# Altium PCB FanControllerPCB.PcbDoc
Units mm, origin at the board's own origin, x right, y up, seen from the top; angles counter-clockwise.
Board outline 91.21 x 81.73 mm, 2 copper layers (Top Layer, Bottom Layer); 39 components, 34 nets, 153 pads, 12 vias.
Unrouted connection lines stored in the file: 4.
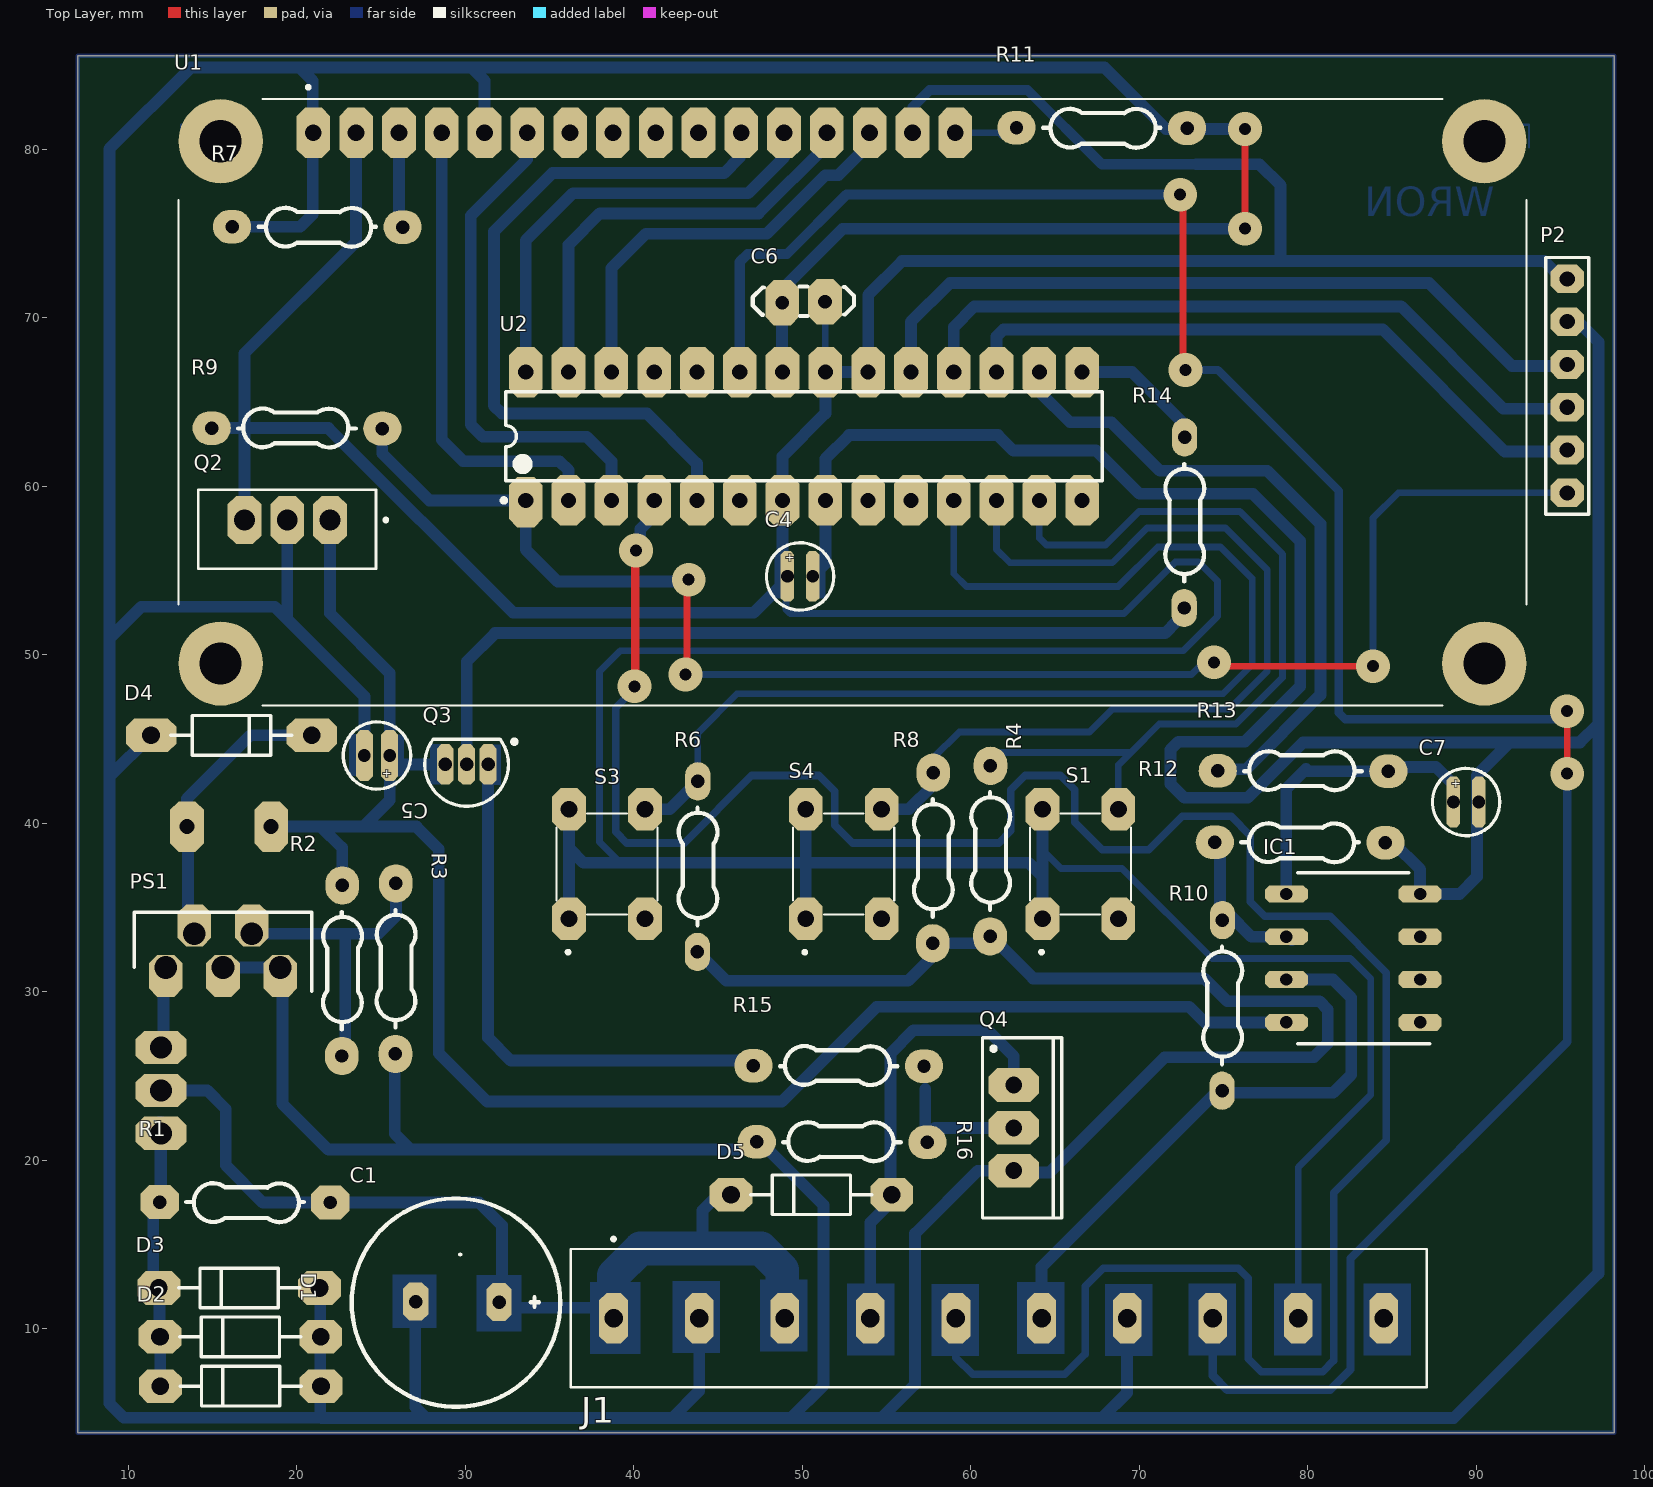
[diagram p0: Top Layer view]
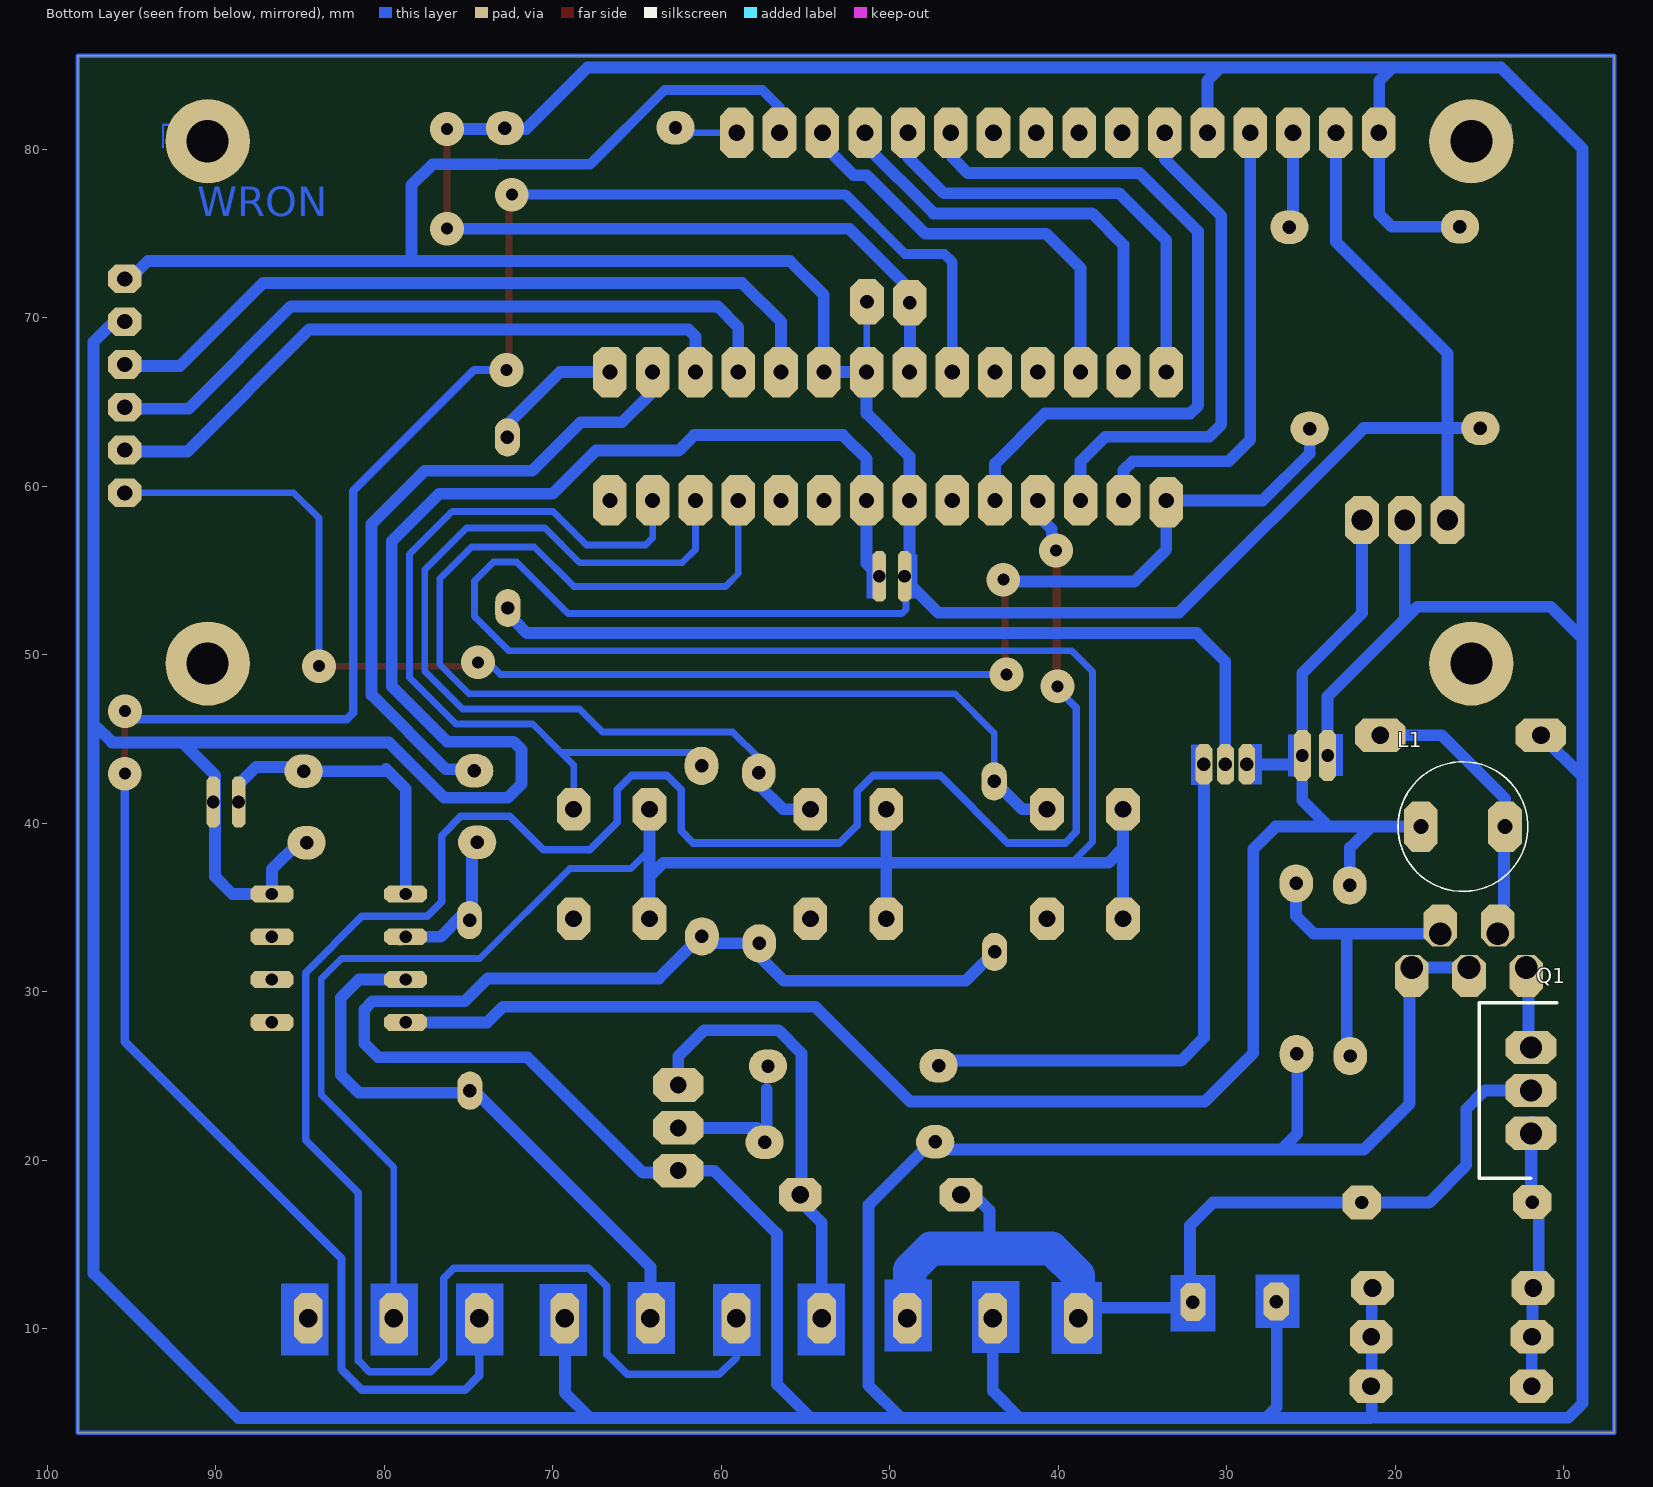
[diagram p1: Bottom Layer view, seen from below]
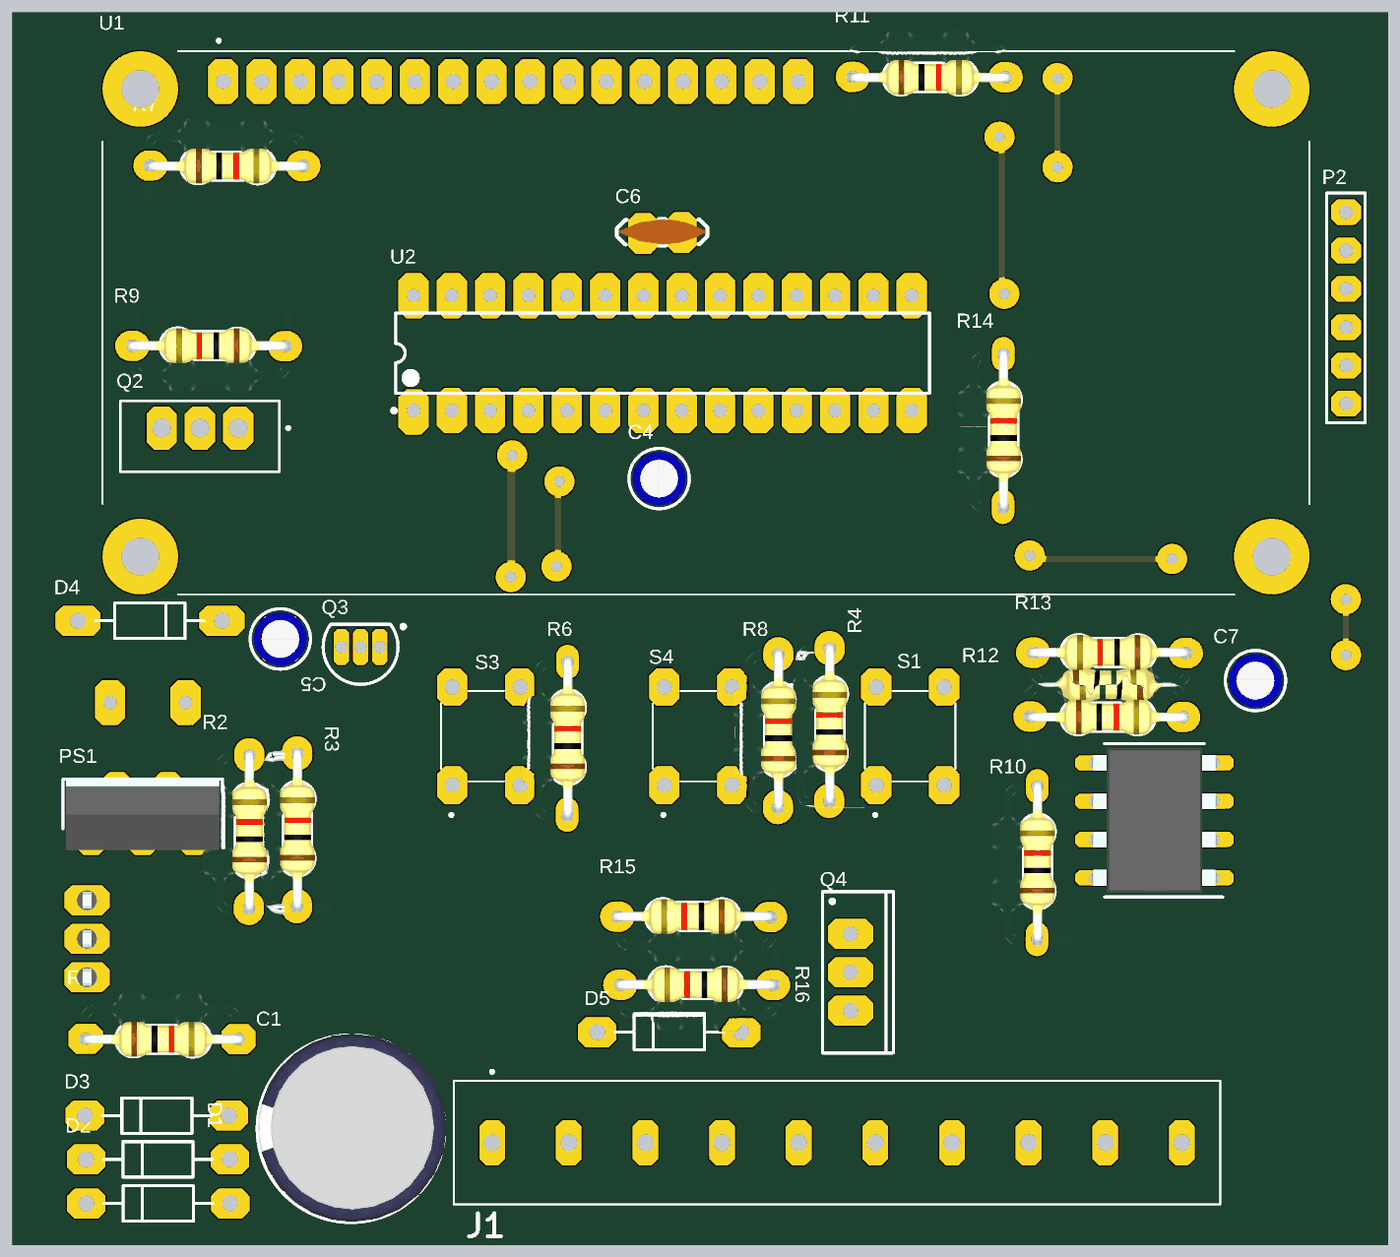
[diagram p2: 3D render of the assembled board from above, using the file's embedded part models]

## Layer stack, top to bottom
Top Solder: solder mask 0.0102, Solder Resist, Dk 3.5
Top Layer: signal copper 0.0356
Dielectric 1: dielectric 0.32, FR-4, Dk 4.8
Bottom Layer: signal copper 0.0356
Bottom Solder: solder mask 0.0102, Solder Resist, Dk 3.5

## Board outline
6.98,3.83 6.98,85.56 98.18,85.56 98.18,3.84 98.19,3.83

## Design rules (kind name [scope] priority, off if disabled: settings)
Clearance [All] p1: gap=0.5 ignorepadtopadclearanceinfootprint=FALSE
PolygonConnect [All] p1: connectstyle=Relief reliefconductorwidth=0.254 reliefentries=4 polygonreliefangle="90 Angle" airgapwidth=0.254
RoutingVias [All] p1: holewidth=0.711 width=1.27 viastyle="Through Hole" minholewidth=0.711 minwidth=1.27 maxholewidth=0.711 maxwidth=1.27
SolderMaskExpansion [All] p1: expansion=0.102
Width [All] p1: maxlimit=2 minlimit=0.4 preferedwidth=0.7
30 further rules are at their usual default settings.

## Components (designator, comment, footprint, x,y, rotation, side; value= is the part's Value field where it differs from the comment)
C1 "100 μF" "Radial 12.5 x 25" 29.52,11.595 r90 top value="100 µF"
C4 "100 μF" "RADIAL 3.5x7.7"#1 49.86,54.65 r0 top value="100 µF"
C5 "100 μF" "RADIAL 3.5x7.7"#2 24.75,44.02 r180 top value="100 µF"
C6 "100 nF" "Ceramic Capacitor 2" 50.08,70.9 r0 top
C7 "100 μF" "RADIAL 3.5x7.7"#1 89.39,41.26 r0 top value="100 µF"
D1 "Diode Zener" ONSC-AXIAL_LEAD-2-59-10_P#1 16.66,6.59 r0 top
D2 "Diode Zener" ONSC-AXIAL_LEAD-2-59-10_P#1 16.64,9.52 r0 top
D3 "Diode Zener" ONSC-AXIAL_LEAD-2-59-10_P#1 16.57,12.42 r0 top
D4 "1N5822" ONSC-AXIAL_LEAD-2-59-10_P#2 16.11,45.22 r180 top
D5 "1N5822" ONSC-AXIAL_LEAD-2-59-10_P#1 50.53,17.95 r0 top
IC1 "LM358PE4" DIP794W53P254L959H508Q8N 82.69,31.99 r180 top
J1 "1-282837-0" TE_1-282837-0 61.65,10.624 r0 top
L1 "WE-FI, 7447018" TSL0709RA-102KR19-PF 15.97,39.8 r0 bottom value=150µH
P2 "Header 6" HDR1X6 95.39,59.61 r90 top
PS1 "LM2576-12WT" TO170P470X1016X1900-5P 12.21,31.44 r0 top
Q1 "TIP122" TO255P460X1020X2008-3P 11.93,21.59 r90 bottom
Q2 "LM7805CT/NOPB" TO254P1054X470X2600-3 21.96,58 r180 top
Q3 "2N3904" TO-92A 30.07,43.49 r90 top
Q4 "MOSFET-N" TO-220AB 62.54,21.92 r270 top
R1 "Res_Com" "1K Ohm"#1 16.98,17.49 r0 top
R2 "Res_Com" "1K Ohm"#2 22.69,31.31 r90 top
R3 "Res_Com" "1K Ohm"#2 25.87,31.43 r90 top
R4 "Res_Com" "1K Ohm"#2 61.16,38.41 r90 top
R6 "Res_Com" "1K Ohm"#3 43.79,37.49 r90 top
R7 "Res_Com" "1K Ohm"#2 21.27,75.38 r0 top
R8 "Res_Com" "1K Ohm"#2 57.76,38 r90 top
R9 "Res_Com" "1K Ohm"#2 19.94,63.45 r180 top
R10 "Res_Com" "1K Ohm"#3 74.93,29.25 r90 top
R11 "Res_Com" "1K Ohm"#2 67.83,81.26 r0 top
R12 "Res_Com" "1K Ohm"#2 79.6,38.85 r0 top
R13 "Res_Com" "1K Ohm"#2 79.65,43.11 r180 top
R14 "Res_Com" "1K Ohm"#3 72.68,57.9 r90 top
R15 "Res_Com" "1K Ohm"#2 52.09,25.61 r180 top
R16 "Res_Com" "1K Ohm"#2 52.29,21.09 r180 top
S1 "1825967-1" SW_1825967-1 66.5,37.58 r90 top
S3 "1825967-1" SW_1825967-1 38.4,37.58 r90 top
S4 "1825967-1" SW_1825967-1 52.45,37.58 r90 top
U1 "LCD2X16" LCD_LCD2X16 52.97,64.98 r0 top
U2 "ATmega8A-PU" 28P3 50.09,62.97 r90 top

## Footprints (in the part's own frame and the unit in brackets; to place one, negate y for a bottom-side part, rotate by r counter-clockwise, add the part's x,y. Pads: shape width x height; smd on the part's side, far side on the other; paste and mask are expansions set on the pad)
"1K Ohm"#1 [mm] "RESISTENCIA DE 1/4 W DE 1K OHM"
  oct 2.27x2 hole 0.8: 1(-5.125,0.025) 2(5,0)
  silkscreen extent -3.55,-1.17 3.42,1.14, body extent -5.56,-2.35 5.38,3.13, height 2.93
"1K Ohm"#2 [mm] "RESISTENCIA DE 1/4 W DE 1K OHM"
  oval 2.27x2 hole 0.8: 1(-5.125,0.025) 2(5,0)
  silkscreen extent -3.55,-1.17 3.42,1.14, body extent -5.56,-2.35 5.38,3.13, height 2.93
"1K Ohm"#3 [mm] "RESISTENCIA DE 1/4 W DE 1K OHM"
  oval 2.27x1.5 hole 0.8: 1(-5.125,0.025) 2(5,0)
  silkscreen extent -3.55,-1.17 3.42,1.14, body extent -5.56,-2.35 5.38,3.13, height 2.93
28P3 [mm] "28-Pin Plastic Dual In-Line Package (PDIP)"
  oct 3x2 hole 0.9 copper offset -0.1,0: 1(-3.81,16.51)
  oct 3x2 hole 0.9: 2(-3.81,13.97) 3(-3.81,11.43) 4(-3.81,8.89) 5(-3.81,6.35) 6(-3.81,3.81) 7(-3.81,1.27) 8(-3.81,-1.27) 9(-3.81,-3.81) 10(-3.81,-6.35) 11(-3.81,-8.89) 12(-3.81,-11.43) 13(-3.81,-13.97) 14(-3.81,-16.51) 15(3.81,-16.51) 16(3.81,-13.97) 17(3.81,-11.43) 18(3.81,-8.89) 19(3.81,-6.35) 20(3.81,-3.81) 21(3.81,-1.27) 22(3.81,1.27) 23(3.81,3.81) 24(3.81,6.35) 25(3.81,8.89) 26(3.81,11.43) 27(3.81,13.97) 28(3.81,16.51)
  silkscreen extent -3.93,-17.7 2.65,17.93, body extent -3.6,-17.65 3.6,17.65, height 4.58
"Ceramic Capacitor 2" [mm] "CAPACITOR CERAMICO"
  oct 2x2.7 hole 0.813: 1(-1.276,0) 2(1.264,0.054)
  silkscreen extent -3.03,-0.8 2.98,0.95, body extent -2.93,-0.74 2.91,0.96, height 6.92
DIP794W53P254L959H508Q8N [mm]
  oct 2.55x1 hole 0.73: 1(-3.97,3.81) 2(-3.97,1.27) 3(-3.97,-1.27) 4(-3.97,-3.81) 5(3.97,-3.81) 6(3.97,-1.27) 7(3.97,1.27) 8(3.97,3.81)
  silkscreen extent -4.53,-5.08 3.3,5.08, body extent -4.1,-4.79 4.1,4.79, height 5.08
HDR1X6 [mm] "Connector; Header; 6 Position"
  oct 1.7x2 hole 0.9: 1(0,0) 2(2.54,0) 3(5.08,0) 4(7.62,0) 5(10.16,0) 6(12.7,0)
  silkscreen extent -1.27,-1.27 13.97,1.27
LCD_LCD2X16 [mm]
  oct 2x3 hole 1: 1(-32,16) 2(-29.46,16) 3(-26.92,16) 4(-24.38,16) 5(-21.84,16) 6(-19.3,16) 7(-16.76,16) 8(-14.22,16) 9(-11.68,16) 10(-9.14,16) 11(-6.6,16) 12(-4.06,16) 13(-1.52,16) 14(1.02,16) 15(3.56,16) 16(6.1,16)
  round 5 hole 2.5: S1(-37.5,15.5) S2(37.5,15.5) S3(37.5,-15.5) S4(-37.5,-15.5)
  silkscreen extent -40,-18 40,18.8
ONSC-AXIAL_LEAD-2-59-10_P#1 [mm] "AXIAL, 2-Leads, Diameter 2.35mm"
  oct 2.55x2 hole 1.05: 1(-4.77,0) 2(4.77,0)
  silkscreen extent -3.59,-1.17 3.59,1.17
ONSC-AXIAL_LEAD-2-59-10_P#2 [mm] "AXIAL, 2-Leads, Diameter 2.35mm"
  oct 3x2 hole 1.05: 1(-4.77,0) 2(4.77,0)
  silkscreen extent -3.59,-1.17 3.59,1.17
"RADIAL 3.5x7.7"#1 [mm] "Capacitor  Electrolitico Radial 3.5mm diametro  x 7.7mm de altura (1.5mm entre pines)"
  oct 0.8x3 hole 0.75: 1(-0.75,0) 2(0.75,0)
  silkscreen extent -2,-2 2,2, body extent -1.78,-1.78 1.77,1.77, height 8.53
"RADIAL 3.5x7.7"#2 [mm] "Capacitor  Electrolitico Radial 3.5mm diametro  x 7.7mm de altura (1.5mm entre pines)"
  oct 1x3 hole 0.75: 1(-0.75,0) 2(0.75,0)
  silkscreen extent -2,-2 2,2, body extent -1.78,-1.78 1.77,1.77, height 8.53
"Radial 12.5 x 25" [mm] "Capacitor  Electrolitico Radial 12.5mm diametro  x 25mm de altura (5mm entre pines)"
  oct 2.27x1.5 hole 0.8: 1(-0.012,-2.476) 2(0.013,2.477)
  silkscreen extent -6.23,-6.1 6.14,6.28, body extent -6.24,-6.26 6.26,6.24, height 26.49
SW_1825967-1 [mm]
  oct 2.508x2 hole 1: 1(-3.25,2.25) 2(3.25,2.25) 3(-3.25,-2.25) 4(3.25,-2.25)
  silkscreen extent -5.33,-3 3,3
TE_1-282837-0 [mm]
  oct 1.7x3 hole 1.1: 1(-22.86,0) 2(-17.78,0) 3(-12.7,0) 4(-7.62,0) 5(-2.54,0) 6(2.54,0) 7(7.62,0) 8(12.7,0) 9(17.78,0) 10(22.86,0)
  silkscreen extent -25.4,-4.1 25.4,4.8
TO170P470X1016X1900-5P [mm]
  oct 2x2.5 hole 1.35 copper offset 0,-0.5: 1(0,0) 3(3.4,0) 5(6.8,0)
  oct 2x2.5 hole 1.35 copper offset 0,0.5: 2(1.7,2) 4(5.1,2)
  silkscreen extent -1.87,-1.42 8.67,3.28, body extent -1.68,-1.42 8.48,3.28, height 17.61
TO254P1054X470X2600-3 [mm]
  oct 2x2.86 hole 1.24: 1(0,0) 2(2.54,0) 3(5.08,0)
  silkscreen extent -3.41,-1.8 7.81,2.9
TO255P460X1020X2008-3P [mm]
  oct 1.98x3 hole 1.32: 1(0,0) 2(2.55,0) 3(5.1,0)
  silkscreen extent -2.65,-1.53 7.75,3.07, body extent -2.55,-1.53 7.65,3.07, height 19.22
TO-92A [mm] "TO, Flat Index; 3 In-Line, Axial Leads; Body Dia. 4.5mm; Leads 0.51 x 0.48 mm (max)"
  oct 2.4x1 hole 0.8: 1(0,-1.27) 2(0,0) 3(0,1.27)
  silkscreen extent -2.48,-2.96 1.5,2.48, body extent -2.48,-2.5 1.5,2.5, height 6.86
TO-220AB [mm] "TO, Thru-Hole, Vertical, Heatsink Mounted; 3 In-Line Leads; Pitch 2.54 mm"
  oct 2x3 hole 1: 1(-2.54,0) 2(0,0) 3(2.54,0)
  silkscreen extent -5.35,-1.85 5.35,2.85, body extent -5.4,-1.9 5.4,2.9, height 19.3
TSL0709RA-102KR19-PF [mm]
  oct 2x3 hole 0.89: 1(-2.5,0) 2(2.5,0)
  silkscreen extent -3.85,-3.85 3.85,3.85

## Part data
C1 C4 C5 C7: library part "Electrolitic Capacitor, Thru-Hole", "Electrolitic Capacitor, Thru-Hole", Contact=cynetik_group@hotmail.com, Created by="Zion Blue", Published="28 April 2014", Publisher="Cynetik Group"
C6: library part "Ceramic Capacitor, Thru-Hole.", "Ceramic Capacitor, Thru-Hole", Contact=cynetik_group@hotmail.com, Created by="Zion Blue", Published="28 April 2014", Publisher="Cynetik Group"
D4 D5: "Diode", Manufacturer_Name="HY Electronic Corp", Datasheet Link=https://docs.rs-online.com/7b99/0900766b814bbef7.pdf, Manufacturer_Part_Number=1N5822
IC1: "Integrated Circuit", Manufacturer_Name="Texas Instruments", Mouser Part Number=595-LM358PE4, Arrow Part Number=LM358PE4, Arrow Price/Stock=https://www.arrow.com/en/products/lm358pe4/texas-instruments, Datasheet Link=http://www.ti.com/lit/ds/symlink/lm358.pdf, Height=5.08mm, Manufacturer_Part_Number=LM358PE4, Mouser Price/Stock=https://www.mouser.co.uk/ProductDetail/Texas-Instruments/LM358PE4?qs=VBduBm9rCJTWtuRHSrRjAg%3D%3D
J1: "TERMI-BLOK PCB MOUNT 10P", Package=None, Availability=Unavailable, DigiKey-Purchase-URL=https://snapeda.com/shop?store=DigiKey&id=520357, EU_RoHS_Compliance="Compliant with Exemptions", MF="TE Connectivity", MP=1-282837-0, Price=None, SnapEDA_Link=https://www.snapeda.com/parts/1-282837-0/TE%20Connectivity%20AMP%20Connectors/view-part/520357/?ref=snap
L1: "WE-FI Leaded Toroidal Line Choke, L = 150µH", Manufacturer="Wurth Elektronik", partNo=7447018, ComponentLink1Description=Manufacturer, ComponentLink1URL=http://www.we-online.de, ComponentLink2Description=Datasheet, ComponentLink2URL=http://katalog.we-online.de/pbs/datasheet/7447018.pdf, Created by="Baojun Chen", Created Date=Feb.2016
P2: "Header, 6-Pin", LatestRevisionDate=17-Jul-2002, LatestRevisionNote="Re-released for DXP Platform.", Publisher="Altium Limited"
PS1: "Power Supply", Manufacturer_Name=Microchip, Mouser Part Number=998-LM2576-12WT, Arrow Part Number=LM2576-12WT, Arrow Price/Stock=https://www.arrow.com/en/products/lm2576-12wt/microchip-technology, Datasheet Link=http://ww1.microchip.com/downloads/en/DeviceDoc/lm2576.pdf, Height=4.7mm, Manufacturer_Part_Number=LM2576-12WT, Mouser Price/Stock=https://www.mouser.co.uk/ProductDetail/Microchip-Technology-Micrel/LM2576-12WT?qs=kh6iOki%2FeLFUlIqd4u5Ybw%3D%3D
Q1: "Transistor BJT NPN", Manufacturer_Name=STMicroelectronics, Mouser Part Number=511-TIP122, Arrow Part Number=TIP122, Arrow Price/Stock=https://www.arrow.com/en/products/tip122/stmicroelectronics, Datasheet Link=http://www.st.com/web/en/resource/technical/document/datasheet/CD00000911.pdf, Height=4.6mm, Manufacturer_Part_Number=TIP122, Mouser Price/Stock=https://www.mouser.co.uk/ProductDetail/STMicroelectronics/TIP122?qs=ljbEvF4DwOPuWPwhe20bIQ%3D%3D
Q2: "Linear Voltage Regulator IC 1 Output 1A TO-220-3", Package="TO-220 ON Semiconductor", Availability=Unavailable, MF="ON Semiconductor", MP=LM7805CT, Price=None, SnapEDA_Link=https://www.snapeda.com/parts/LM7805CT/ON%20Semiconductor/view-part/546231/?ref=snap
Q3: "NPN General Purpose Amplifier", ComponentLink1Description="Manufacturer Link", ComponentLink1URL=http://www.fairchildsemi.com/, ComponentLink2Description=Datasheet, ComponentLink2URL=http://www.fairchildsemi.com/ds/2N%2F2N3904.pdf, DatasheetVersion=1997, LatestRevisionDate=15-Jan-2003, LatestRevisionNote="PCB Footprint 'BCY-W3/D4.7' replaced", PackageDescription="TO, Flat Index; 3 In-Line, Axial Leads; Body Dia. 4.5mm; Leads 0.51 x 0.48 mm (max)", PackageReference=TO-92A, PackageVersion=Sep-1998, Published=8-Jun-2000, Publisher="Altium Limited"
Q4: "N-Channel MOSFET", LatestRevisionDate=17-Jul-2002, LatestRevisionNote="Re-released for DXP Platform.", PackageDescription="TO, Flat Index; 3 In-Line, Axial Leads; Body Dia. 4.6mm; Lead Dia. 0.5 mm (max)", PackageReference=E3, PackageVersion=1995/1996, Published=8-Jun-2000, Publisher="Altium Limited"
S1 S3 S4: "Switch Tactile OFF (ON) SPST Round Button PC Pins 0.05A 24VDC 1.57N Thru-Hole", Package=None, Availability=Warning, BuyPart=https://www.snapeda.com/parts/1825967-1/TE%20Connectivity%20/%20DEUTSCH/view-part/398388/?ref=eda, DigiKey-Purchase-URL=https://snapeda.com/shop?store=DigiKey&id=398388, MF="TE Connectivity", Mouser-Purchase-URL=https://snapeda.com/shop?store=Mouser&id=398388, MP=1825967-1, Price=None, SnapEDA_Link=https://www.snapeda.com/parts/1825967-1/TE%20Connectivity%20/%20DEUTSCH/view-part/398388/?ref=snap
U1: "Display; Display: LCD 2x16 characters (blue backlight)", Package=None, Availability=Unavailable, MF=mikroElektronika, MP=LCD2X16, Price=None, SnapEDA_Link=https://www.snapeda.com/parts/LCD2X16/mikroElektronika/view-part/2472530/?ref=snap
U2: "8-bit AVR Microcontroller, 2.7-5.5V, 16MHz, 8KB Flash, 512 Bytes EEPROM, 1KB SRAM, 28-pin PDIP, Industrial Grade (-40°C to 85°C)", ComponentLink1Description="Manufacturer URL", ComponentLink1URL=http://www.atmel.com/, ComponentLink2Description="ATmega8A Datasheet", ComponentLink2URL=http://www.atmel.com/dyn/resources/prod_documents/doc8159.pdf, ComponentLink3Description="ATmega8A Summary", ComponentLink3URL=http://www.atmel.com/dyn/resources/prod_documents/8159S.pdf, DatasheetVersion="revD, Feb-2011", PackageDescription="28-lead (0.300\"/7.62mm Wide) Plastic Dual Inline Package (PDIP)", PackageReference=28P3, PackageVersion="revB, Sep-2001"

## Via types
v1: diameter 2, hole 0.711, Top Layer to Bottom Layer, 12 vias

## Nets (pads, with @x,y where several pads share a name; then routed paths per layer and width w, separated by ;. In a path a pad name is that pad's centre, name@x,y a point inside that pad or via, vN(x,y) a via of type N, cw(c..) or ccw(c..) an arc to the next point about the centre after c; other vN are vias at no path point)
12V: C5.1 IC1.8 L1.2 Q2.1 Q3.3 R2.2 | length 104.5
  Bottom Layer w0.7: L1.2 21.42,39.8 ; Q2.1 21.96,52.46 25.51,48.91 C5.1@25.51,43.31 ; R2.2 22.69,38.56 22.66,38.56 21.42,39.8 ; Q3.3 28.225,43.49 26.035,43.49 25.69,43.49 C5.1@25.51,43.31 ; IC1.8 73.88,28.18 72.95,29.11 54.4,29.11 48.77,23.48 31.29,23.48 28.42,26.35 28.42,38.47 27.09,39.8 23.94,39.8 ; 21.42,39.8 23.94,39.8 ; 23.94,39.8 25.51,41.37 C5.1@25.51,43.31
+5V: C4.1 C6.2 J1.9 P2.6 Q2.3 R9.2 S1.1 S1.2 S3.1 S3.2 S4.1 S4.2 U1.2 U1.15 U2.7 U2.20 U2.21 | length 336.7
  Bottom Layer w0.4: 39.17,37.66 37.95,38.88 37.95,49 39.184,50.234 72.586,50.234 74.63,52.278 74.63,54.38 73.51,55.5 72.13,55.5 69.08,52.45 49.27,52.45 49.03,52.69 49.03,54.2 49.03,54.57 C4.1 ; C6.2 51.36,70.938 U2.21 ; U1.15 56.53,82.5 ; 64.25,38.2 64.46,38.2 65.34,37.32 68.97,37.32 74.32,31.97 82.52,31.97 83.735,30.755 83.735,23.895 79.43,19.59 J1.9
  Bottom Layer w0.6: 56.53,82.5 57.55,83.52 63.36,83.52 67.77,79.11 73.354,79.11
  Bottom Layer w0.7: R9.2 16.88,63.45 ; Q2.3 16.88,63.45 ; U1.2 23.51,74.51 16.88,67.88 16.88,63.45 ; S3.1 36.15,38.51 ; S3.2 36.15,38.51 ; C4.1@48.82,54.2 47.11,52.49 32.823,52.49 21.863,63.45 16.88,63.45 ; C4.1@48.82,54.65 U2.7 48.82,61.78 51.36,64.32 U2.21 U2.20 53.9,71.36 55.91,73.37 78.375,73.37 ; S4.1 50.2,37.66 ; S4.2 50.2,37.66 ; S1.1 64.25,36.83 ; S1.2 64.25,38.2 64.25,36.83 ; 73.354,79.11 77.12,79.11 78.375,77.855 78.375,73.37 ; P2.6@95.164,72.222 94.016,73.37 78.375,73.37 ; 36.15,38.51 37,37.66 39.17,37.66 50.2,37.66 ; 50.2,37.66 63.42,37.66 64.25,36.83
+48V: C1.1 D5.1 J1.1 J1.3 Q1.2 R1.2 | length 59.9
  Bottom Layer w0.7: Q1.2 14.67,24.14 15.77,23.04 15.77,19.7 17.98,17.49 R1.2 30.81,17.49 32.16,16.14 32.16,12.04 32.96,11.24 38.174,11.24 J1.1 38.79,12.43 ; 44.06,15.22 44.06,17.01 44.93,17.88 D5.1@45.69,17.88 ; J1.3 J1.3@49.29,10.964
  Bottom Layer w1: 47.97,12.42 48.01,12.38 48.3,12.38
  Bottom Layer w2: J1.1 38.8,10.634 38.8,13.18 40.38,14.76 44.06,14.76 47.54,14.76 48.8,13.5 48.8,12.38 48.8,10.774 J1.3
-48V: C1.2 C4.2 C5.2 C6.1 C7.2 D1.2 D2.2 D3.2 D4.2 IC1.4 J1.2 J1.7 P2.5 PS1.3 PS1.5 Q2.2 Q4.3 R3.1 R4.1 R6.1 R7.1 R8.1 R11.2 R12.2 R16.2 U1.1 U1.5 U2.8 U2.22 | length 668.9
  Top Layer w0.4: v1@75.59,75.29 76.27,75.97 v1(76.27,81.2)
  Bottom Layer w0.7: D4.2 8.87,42.75 ; PS1.3 PS1.5 19.14,31.31 19.14,23.36 21.87,20.63 26.74,20.63 ; R7.1 20.2,75.405 20.93,76.135 20.93,84.07 20.35,84.65 ; Q2.2 19.42,52.11 ; D3.2 21.375,12.385 21.375,9.555 D2.2 ; D2.2@21.355,9.483 D2.2@21.385,9.438 ; D2.2@21.38,8.792 21.38,4.79 21.45,4.72 ; D2.2@21.385,9.52 D2.2@21.385,9.438 ; D1.2 21.385,6.635 D2.2@21.385,9.438 ; D2.2@21.61,9.105 D2.2@21.385,9.438 ; C5.2@24.01,43.31 24.01,47.52 19.42,52.11 ; R3.1@25.805,26.305 25.805,21.565 26.74,20.63 ; C1.2@27.677,11.595 27.02,10.938 27.02,5.34 27.66,4.7 ; 30.515,84.685 31.13,84.07 U1.5 ; R6.1 45.48,30.65 56.27,30.65 57.735,32.115 R8.1 60.785,32.875 61.195,33.285 63.69,30.79 73.85,30.79 75.21,29.43 80.69,29.43 81.18,28.94 81.18,26.93 80.36,26.11 71.49,26.11 64.65,19.27 62.65,19.27 Q4.3 60.41,19.38 56.68,15.65 56.68,6.69 54.69,4.7 ; J1.2 43.87,6.31 42.26,4.7 ; R16.2@47.35,21.55 R16.2@47.195,21.395 ; C6.1@48.784,70.47 48.784,66.816 U2.22 ; C6.1 48.804,71.704 52.38,75.28 75.58,75.28 v1@75.59,75.29 ; C4.2 51.36,55.4 U2.8 51.36,61.63 52.77,63.04 61.6,63.04 62.52,62.12 67.43,62.12 70,59.55 76.74,59.55 79.54,56.75 79.54,48.117 76.258,44.835 72.315,44.835 71.842,44.362 71.842,42.338 72.67,41.51 76.43,41.51 79.715,44.795 91.985,44.795 ; J1.7 69.27,6.2 67.77,4.7 ; v1(76.27,81.2) 71.58,81.2 67.93,84.85 13.7,84.85 8.87,80.02 8.87,50.96 ; R12.2 85.07,38.85 86.66,37.26 IC1.4 89,35.8 90.03,36.83 90.03,42.84 91.985,44.795 ; P2.5@95.164,69.682 96.128,69.682 96.48,69.33 96.89,68.92 97.24,68.57 97.24,45.89 ; 8.87,42.75 8.87,50.96 ; 8.87,42.75 8.87,5.57 9.72,4.72 21.45,4.72 ; 8.87,50.96 10.76,52.85 18.68,52.85 19.42,52.11 ; 21.45,4.72 21.47,4.7 27.66,4.7 ; 26.74,20.63 46.43,20.63 R16.2@47.195,21.395 ; 27.66,4.7 42.26,4.7 ; 42.26,4.7 49.3,4.7 ; R16.2@47.195,21.395 47.395,21.195 51.25,17.34 51.25,6.65 49.3,4.7 ; 49.3,4.7 54.69,4.7 ; 54.69,4.7 67.77,4.7 ; 67.77,4.7 88.66,4.7 97.24,13.28 97.24,45.89 ; 91.985,44.795 96.145,44.795 97.24,45.89
  other v1: 76.27,75.29
Analog: J1.8 U2.23 | length 140.3
  Top Layer w0.4: v1(72.42,77.31) 72.58,77.15 72.58,67.06 v1(72.74,66.9) ; v1(95.38,46.65) 95.385,46.645 95.385,42.95 v1(95.39,42.945)
  Bottom Layer w0.5: v1(72.74,66.9) 74.66,66.9 81.84,59.72 81.84,46.55 82.21,46.18 95.045,46.18 v1@95.035,46.19 ; J1.8 74.35,7.22 75.205,6.365 81.317,6.365 82.53,7.578 82.53,14.17 95.39,27.03 v1(95.39,42.945)
  Bottom Layer w0.6: U2.23 46.28,73.32 46.75,73.79 49.088,73.79 52.608,77.31 v1(72.42,77.31)
d5: U1.11 U2.5 | length 43.9
  Bottom Layer w0.7: U2.5 43.74,61.35 40.77,64.32 32.16,64.32 31.69,64.79 31.69,75.12 35.16,78.59 45.35,78.59 46.26,79.5 46.26,80.87 U1.11
d6: U1.12 U2.28 | length 26.6
  Bottom Layer w0.7: U2.28 33.58,74.59 36.38,77.39 46.77,77.39 48.91,79.53 U1.12
d7: U1.13 U2.27 | length 26.1
  Bottom Layer w0.7: U2.27 36.12,74.33 37.98,76.19 47.39,76.19 51.45,80.25 U1.13
d8: U1.14 U2.26 | length 25.2
  Bottom Layer w0.7: U2.26 38.66,72.94 40.71,74.99 47.887,74.99 51.357,78.46 52.132,78.46 53.99,80.318 U1.14
E: U1.6 U2.3 | length 30.3
  Bottom Layer w0.7: U1.6 33.67,79.41 30.31,76.05 30.31,63.66 31.03,62.94 37.2,62.94 38.66,61.48 U2.3
Gate: R14.2 U2.15 | length 8.1
  Bottom Layer w0.7: U2.15 69.56,66.78 72.68,63.66 R14.2
MISO: P2.3 U2.18 | length 41.9
  Bottom Layer w0.7: U2.18 58.98,69.45 60.2,70.67 85.53,70.67 91.598,64.602 P2.3@95.164,64.602
MOSI: P2.2 U2.17 | length 38.9
  Bottom Layer w0.7: U2.17 61.52,68.89 61.94,69.31 84.44,69.31 91.688,62.062 P2.2@95.164,62.062
NetC7_1: C7.1 IC1.5 R13.1 | length 17.1
  Bottom Layer w0.7: IC1.5 78.72,42.05 79.885,43.215 80.015,43.085 R13.1 ; R13.1@84.77,43.34 87.59,43.34 C7.1@88.625,42.305
NetD1_K: D1.1 D2.1 D3.1 Q1.1 R1.1 | length 20.3
  Bottom Layer w0.7: D3.1@11.475,12.15 11.475,17.135 R1.1 11.893,17.553 11.893,21.553 Q1.1 Q1.1@11.93,22.28 ; D3.1 11.835,12.385 11.835,9.555 D2.1 11.88,9.51 11.88,6.6 D1.1 ; Q1.1@11.84,21.59 Q1.1@11.84,22.28 ; 11.94,18.59 Q1.1@11.94,21.31 ; Q1.1@11.97,21.59 Q1.1@11.97,22.13 ; D1.1@12.59,6.6 D1.1@12.69,6.5
NetD4_1: D4.1 L1.1 PS1.2 | length 17.1
  Bottom Layer w0.7: L1.1@13.36,39.66 13.53,39.49 13.53,33.82 PS1.2 ; L1.1 13.47,41.45 17.24,45.22 D4.1
NetD5_2: D5.2 J1.4 Q4.1 | length 26.4
  Bottom Layer w0.7: J1.4 54.03,16.3 55.14,17.41 55.14,17.63 55.23,17.72 55.23,26.351 56.589,27.71 61,27.71 62.54,26.17 Q4.1
NetIC1_6: IC1.6 R10.2 R12.1 | length 9.4
  Bottom Layer w0.7: R12.1@74.485,39.065 74.777,38.773 74.777,34.403 R10.2 ; R10.2@75.295,34.615 76.65,33.26 IC1.6 78.85,33.26 IC1.6@79.04,33.07
NetPS1_1: PS1.1 Q1.3 | length 4.9
  Bottom Layer w0.7: Q1.3 12.07,26.83 12.07,31.3 PS1.1
NetPS1_4: PS1.4 R2.1 R3.2 | length 18.3
  Bottom Layer w0.7: PS1.4 22.86,33.44 ; R2.1 22.86,26.38 22.86,33.44 ; R3.2 25.87,34.48 24.83,33.44 22.86,33.44
NetQ3_1: Q3.1 R15.2 | length 32.6
  Bottom Layer w0.7: Q3.1 31.34,27.27 32.7,25.91 R15.2@47.165,25.91
NetQ3_2: Q3.2 R14.1 | length 49.2
  Bottom Layer w0.7: Q3.2 30.07,49.6 31.754,51.284 71.524,51.284 R14.1@72.215,51.975
NetQ4_2: Q4.2 R15.1 R16.1 | length 8
  Bottom Layer w0.7: 57.29,24.23 57.29,21.71 57.475,21.525 57.87,21.92 Q4.2
NetR7_2: R7.2 U1.3 | length 5.7
  Bottom Layer w0.7: U1.3 26.05,75.6 R7.2
NetR11_1: R11.1 U1.16 | length 2.9
  Bottom Layer w0.4: U1.16 61.7,80.98 R11.1@61.88,80.8
PWM: IC1.7 J1.6 R10.1 | length 35
  Bottom Layer w0.7: J1.6 64.19,13.68 74.52,24.01 74.905,24.01 81.51,24.01 82.57,25.07 82.57,29.64 81.49,30.72 IC1.7
PWM5: R13.2 U2.16 | length 39.3
  Bottom Layer w0.7: U2.16 64.06,65.62 65.88,63.8 68.34,63.8 71.22,60.92 72.012,60.92 72.017,60.915 73.343,60.915 73.348,60.92 77.59,60.92 80.74,57.77 80.74,47.62 76.33,43.21 R13.2@74.55,43.21
RS: U1.4 U2.2 | length 28.3
  Bottom Layer w0.7: U1.4 28.59,62.76 29.86,61.49 35.58,61.49 36.12,60.95 U2.2
RST: P2.1 R9.1 U2.1 | length 92.4
  Top Layer w0.4: v1(43.06,48.83) 43.155,48.925 43.155,54.365 v1(43.25,54.46) ; v1(74.43,49.55) 74.66,49.32 v1(83.86,49.32)
  Bottom Layer w0.4: v1(43.06,48.83) 73.09,48.83 73.81,49.55 v1(74.43,49.55) ; v1(83.86,49.32) 83.86,58.11 85.36,59.61 P2.1
  Bottom Layer w0.7: R9.1 25.065,61.945 27.85,59.16 U2.1 33.58,56.24 35.48,54.34 43.13,54.34 v1(43.25,54.46)
S1: R4.2 S1.3 S1.4 U2.13 | length 49.1
  Bottom Layer w0.4: R4.2@61.01,44.2 69.49,44.2 ; U2.13 64.06,56.93 64.48,56.51 67.99,56.51 69.98,58.5 75.96,58.5 78.49,55.97 78.49,48.64 75.735,45.885 71.175,45.885 69.49,44.2 ; S1.4 68.75,43.46 69.49,44.2 ; 69.51,44.2 69.49,44.2
S2: R6.2 S3.3 S3.4 U2.11 | length 70.5
  Bottom Layer w0.4: R6.2 43.79,45.36 46.115,47.685 74.969,47.685 76.69,49.406 76.69,54.52 74.81,56.4 71.09,56.4 68.74,54.05 59.74,54.05 58.98,54.81 U2.11
  Bottom Layer w0.7: S3.4 42.13,40.83 R6.2
S4: R8.2 S4.3 S4.4 U2.12 | length 54.4
  Bottom Layer w0.4: R8.2 57.76,43.87 59.31,45.42 67.04,45.42 68.405,46.785 75.342,46.785 77.59,49.033 77.59,55.04 75.11,57.52 70.45,57.52 68.39,55.46 62.31,55.46 61.52,56.25 U2.12
  Bottom Layer w0.7: S4.4 56.32,40.83 57.76,42.27 R8.2
SCK: P2.4 U2.19 | length 44.7
  Bottom Layer w0.7: U2.19 56.44,69.75 58.75,72.06 87.19,72.06 92.108,67.142 P2.4@95.164,67.142
T: J1.5 U2.4 | length 144.2
  Top Layer w0.5: v1(40.03,48.13) 40.075,48.175 40.075,56.055 40.03,56.1 v1(40.12,56.19)
  Bottom Layer w0.45: v1(40.03,48.13) 40.03,47.971 38.925,46.866 38.925,39.485 39.584,38.826 42.976,38.826 46.984,42.834 50.975,42.834 51.925,41.884 51.925,39.895 52.994,38.826 61.646,38.826 62.37,39.55 62.37,41.99 63.214,42.834 65.306,42.834 66.15,41.99 66.15,40.07 67.8,38.42 70.56,38.42 72.55,40.41 75.446,40.41 76.59,39.266 76.59,35.344 77.449,34.485 81.313,34.485 84.66,31.138 84.66,30.22 84.66,21.18 81.545,18.065 81.545,8.114 80.871,7.44 77.22,7.44 76.455,8.205 76.455,12.984 75.859,13.58 67.851,13.58 66.78,12.509 66.78,8.5 65.57,7.29 60.1,7.29 59.11,8.28 J1.5
  Bottom Layer w0.7: v1(40.12,56.19) 40.369,56.439 40.369,57.459 41.2,58.29 U2.4
pads on no net: IC1.1 IC1.2 IC1.3 J1.10 U1.7 U1.8 U1.9 U1.10 U1.S1 U1.S2 U1.S3 U1.S4 U2.6 U2.9 U2.10 U2.14 U2.24 U2.25
copper on no net: | length 349.2
  Bottom Layer w0.13: 13.13,81.15 13.13,81.46 13.94,81.46 ; 92.26,81.46 93.13,81.46 93.13,81.21 93.13,80.12
  Bottom Layer w0.254: 6.98,3.83 6.98,85.56 98.18,85.56 98.18,3.84 98.19,3.83 6.98,3.83

## Other copper
Bottom Layer:
  rectangle net NetQ3_1: 31.45,42.28 32.1,44.68
  rectangle net 12V: 27.9,42.29 28.55,44.69
  rectangle: 83.3,8.42 86.12,12.69
  rectangle net +5V: 78,8.414 80.82,12.684
  rectangle net Analog: 72.91,8.414 75.73,12.684
  rectangle net -48V: 67.95,8.384 70.77,12.654
  rectangle net PWM: 62.74,8.504 65.56,12.774
  rectangle net T: 57.65,8.384 60.47,12.654
  rectangle net -48V: 50.92,53.34 51.36,55.94
  rectangle net +5V: 48.35,53.35 48.79,55.95
  rectangle net -48V: 23.1,42.79 23.75,45.29
  rectangle net 12V: 25.71,42.77 26.36,45.27
  rectangle net NetD5_2: 52.63,8.414 55.45,12.684
  rectangle net +48V: 47.47,8.65 50.29,12.92
  rectangle net -48V: 42.3,8.55 45.12,12.82
  rectangle net +48V: 37.4,8.49 40.38,12.76
  rectangle net +48V: 30.65,9.83 33.32,13.18
  rectangle net -48V: 25.67,10.03 28.27,13.23
  text "WRON" at 91.1,75.43 h3

## Text inside footprints (layer, text, board x,y; h text height)
C4: Top Overlay "+" at 48.971,55.539 h0.5
C5: Top Overlay "+" at 25.639,43.131 h0.5 r180
C7: Top Overlay "+" at 88.501,42.149 h0.5